# Altium PCB PCB1.PcbDoc (part 2 of 2)
Units mil, origin at the board's own origin, x right, y up, seen from the top; angles counter-clockwise.
Board outline 866.14 x 866.14 mil, 4 copper layers (Top Layer, Int1 (GND), Int2 (PWR), Bottom Layer), stack 53.912 mil thick; 31 components, 65 nets, 217 pads, 195 vias.
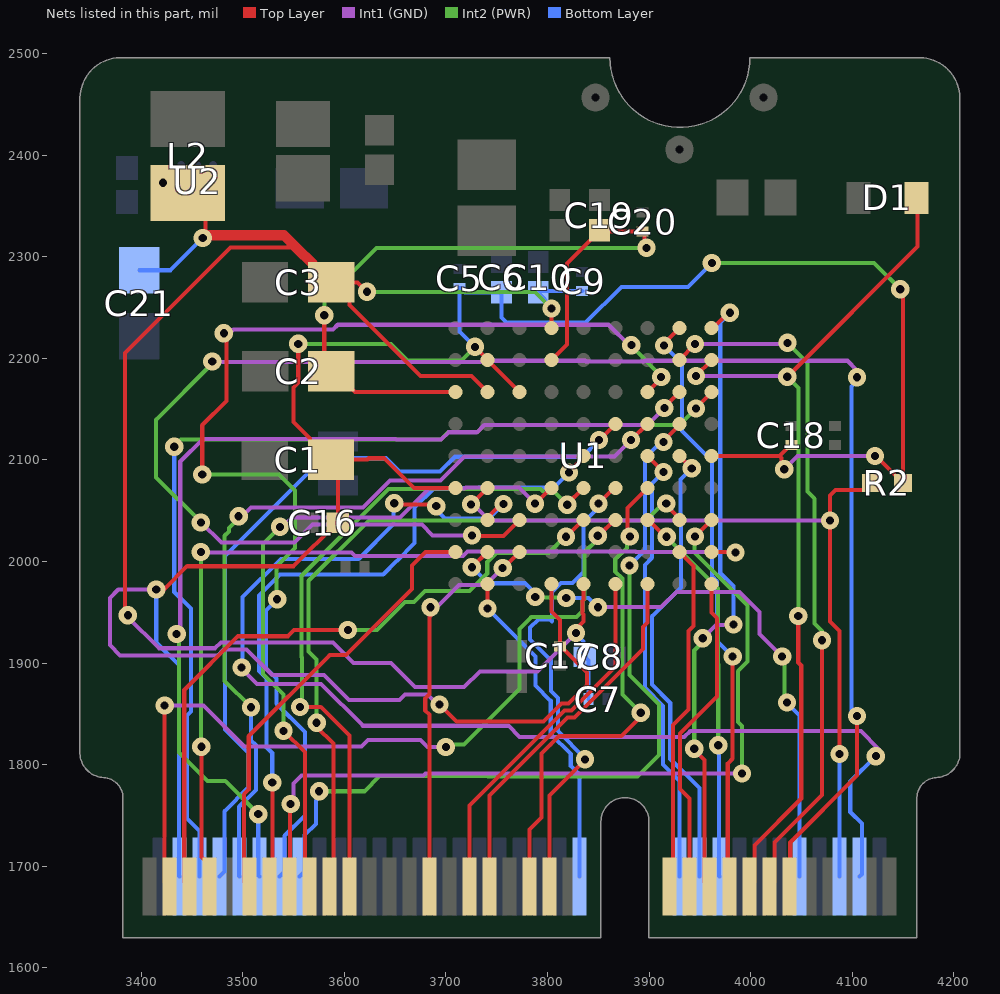
[diagram p4: the nets of this part, all layers, seen from the top]

## Via types
v1: diameter 18, hole 8, Top Layer to Bottom Layer, tented both sides, 195 vias

## Nets (pads, with @x,y where several pads share a name; then routed paths per layer and width w, separated by ;. In a path a pad name is that pad's centre, name@x,y a point inside that pad or via, vN(x,y) a via of type N, cw(c..) or ccw(c..) an arc to the next point about the centre after c; other vN are vias at no path point) (continued)
OWM_IO: pad.62 U1.G7 | length 1143.8
  Top Layer w4: v1(3460.24,2085.83) 3460.24,2134.21 3484.08,2158.05 3484.08,2222.22 v1(3481.5,2224.8) ; U1.G7@3898.43,2166.93 3911.88,2180.38 v1(3911.88,2181.78)
  Int1 (GND) w4: v1(3481.5,2224.8) 3484.17,2227.48 3490.01,2227.48 3490.84,2228.31 3588.8,2228.31 3593.6,2233.11 3860.23,2233.11 3881.14,2212.2 3881.95,2213 v1(3882.55,2213)
  Int2 (PWR) w4: v1(3460.24,2085.83) 3535.83,2085.83 3551.57,2070.08 3551.57,2013.45 3533.19,1995.06 3533.19,1963.79 v1(3533.99,1962.99) ; v1(3882.55,2213) 3882.55,2212.06 3911.88,2182.73 v1(3911.88,2181.78)
  Bottom Layer w4: v1(3533.99,1962.99) 3523.01,1952.01 3523.01,1895.38 3533.46,1884.93 3533.46,1860.09 3561.24,1832.31 3561.24,1750.22 3541.19,1730.17 3541.19,1694.89 pad.62@3536.3,1690
OWM_PE: pad.60 U1.H6 | length 801.6
  Top Layer w4: v1(3914.26,2117.73) 3914.26,2118.75 3929.92,2134.41 U1.H6@3929.92,2135.43
  Int2 (PWR) w4: v1(3575.27,1773.95) 3619.88,1773.95 3634.91,1788.98 3740.94,1788.98 3741.26,1788.66 3888.66,1788.66 3909.67,1809.67 3909.67,1859.23 3880.71,1888.19 v1(3880.71,1996.06)
  Bottom Layer w4: pad.60@3555.98,1690 3560.87,1694.89 3560.87,1730.71 3572.05,1741.89 3572.05,1764.61 3572.59,1765.15 3572.59,1771.27 v1(3575.27,1773.95) ; v1(3880.71,1996.06) 3895.89,2011.24 3895.89,2101.8 3912.6,2118.5 3913.38,2117.73 v1(3914.26,2117.73)
PCIF_D0: pad.55 U1.E4 | length 665.8
  Top Layer w4: v1(3556.49,1856.86) 3556.71,1857.09 3576.89,1857.09 3605.2,1828.77 pad.55@3605.2,1680.16 ; v1(3819.44,2055.92) 3819.44,2056.45 U1.E4@3835.43,2072.44
  Int2 (PWR) w4: v1(3556.49,1856.86) 3558.49,1858.86 3558.49,1905.83 3558.01,1906.31 3558.01,1986.07 3643.41,2071.48 3793.03,2071.48 3796.93,2067.58 3807.78,2067.58 v1(3819.44,2055.92)
PCIF_D1: pad.59 U1.D4 | length 676.2
  Top Layer w4: v1(3540.31,1833.44) 3561.27,1812.49 3561.27,1684.72 pad.59@3565.83,1680.16 ; v1(3787.71,2057) 3788.1,2057 3803.54,2072.44 U1.D4@3803.94,2072.44
  Int1 (GND) w4: v1(3536.78,2034.23) 3539.48,2034.23 3548.74,2043.48 3655.01,2043.48 3683.45,2071.92 3718.61,2071.92 3719.56,2072.87 3772.01,2072.87 3787.71,2057.17 v1(3787.71,2057)
  Int2 (PWR) w4: v1(3536.78,2034.23) 3519.99,2017.4 3519.99,1889.46 3540.31,1869.13 v1(3540.31,1833.44)
PCIF_D2: pad.61 U1.J3 | length 832.1
  Top Layer w4: pad.61@3546.14,1680.16 3546.69,1680.71 3546.69,1760.87 v1(3547.24,1761.42) ; v1(3945.32,2024.8) U1.J3@3961.42,2040.94
  Int1 (GND) w4: v1(3547.24,1761.42) 3550.11,1764.29 3550.11,1781.61 3557.95,1789.45 3677.99,1789.45 3679.79,1791.25 3741.4,1791.25 3741.49,1791.34 v1(3991.49,1791.34)
  Int2 (PWR) w4: v1(3945.32,2024.8) 3944.88,2024.36 3944.88,2009.06 3997.07,1956.87 3997.07,1901.6 3987.57,1892.1 3987.57,1842.23 3991.49,1838.31 v1(3991.49,1791.34)
PCIF_D3: pad.57 U1.H3 | length 717.6
  Top Layer w4: v1(3572.83,1841.34) 3572.83,1837.28 3589.27,1820.85 3589.27,1683.92 pad.57@3585.51,1680.16 ; v1(3916.89,2057.09) 3916.89,2055.53 3929.92,2042.5 U1.H3@3929.92,2040.94
  Int2 (PWR) w4: v1(3572.83,1841.34) 3572.83,1903.54 3565.01,1911.37 3565.01,1981.15 3624.47,2040.61 3772.04,2040.61 3772.22,2040.43 3897.12,2040.43 3913.78,2057.09 v1(3916.89,2057.09)
PCIF_D4: pad.18 U1.G3 | length 381.7
  Top Layer w4: U1.G3@3898.43,2040.94 3899.61,2040.94 3916.14,2024.41 v1(3917.32,2024.41)
  Int2 (PWR) w4: v1(3917.32,2024.41) 3968.07,1973.66 3968.07,1898.55 3968.11,1898.51 v1(3968.11,1819.29)
  Bottom Layer w4: v1(3968.11,1819.29) 3968.74,1818.66 3968.74,1690.63 pad.18@3969.37,1690
PCIF_D5: pad.73 U1.F3 | length 809.1
  Top Layer w4: v1(3423.23,1858.27) 3423.23,1684.96 pad.73@3428.03,1680.16 ; v1(3849.56,2025.43) 3850.49,2025.43 3866,2040.94 U1.F3@3866.93,2040.94
  Int1 (GND) w4: v1(3423.23,1858.27) 3461.42,1858.27 3501.57,1818.11 3616.86,1818.11 3623.2,1824.45 3675.09,1824.45 3682.09,1817.45 v1(3700,1817.45)
  Int2 (PWR) w4: v1(3700,1817.45) 3700,1819.77 3717.8,1819.77 3772.63,1874.6 3772.63,1933.86 3784.09,1945.32 3828.39,1945.32 3834.61,1951.54 3834.61,1961.33 3836.57,1963.3 3836.57,2009.19 3849.56,2022.18 v1(3849.56,2025.43)
PCIF_D6: pad.71 U1.E3 | length 664.5
  Top Layer w4: pad.71@3447.72,1680.16 3442.83,1685.05 3442.83,1708.74 3442.52,1709.05 3442.52,1873.62 3495.45,1926.55 3544.55,1926.55 3550.65,1932.66 v1(3603.54,1932.66) ; v1(3818.28,2024.49) 3818.63,2024.49 3835.08,2040.94 U1.E3@3835.43,2040.94
  Int2 (PWR) w4: v1(3603.54,1932.66) 3632.26,1932.66 3659.84,1960.24 3665.75,1960.24 3668.87,1960.24 3679.53,1970.91 3723.22,1970.91 3740.75,1988.43 3740.75,1999.76 3749.69,2008.7 3801.42,2008.7 3817.21,2024.49 v1(3818.28,2024.49)
PCIF_D7: pad.69 U1.J2 | length 887
  Top Layer w4: v1(3459.35,1817.72) 3459.35,1711.03 3459.61,1710.78 3459.61,1709.05 3461.95,1706.7 3462.51,1706.7 3467.4,1701.82 pad.69@3467.4,1680.16 ; U1.J2@3961.42,2009.45 3961.63,2009.24 3984.87,2009.24 v1(3985.08,2009.03)
  Int1 (GND) w4: v1(3458.89,2009.45) 3459.3,2009.03 3607.08,2009.03 3610.46,2005.65 3716.95,2005.65 3721.37,2010.06 3886.51,2010.06 3887.08,2009.49 3984.62,2009.49 v1(3985.08,2009.03)
  Int2 (PWR) w4: v1(3458.89,2009.45) 3459.12,2009.22 3459.12,1817.95 v1(3459.35,1817.72)
PCIF_D10: pad.32 U1.B1 | length 325.5
  Top Layer w4: v1(3740.94,1953.94) U1.B1@3740.94,1977.95
  Bottom Layer w4: v1(3740.94,1953.94) 3788.28,1906.6 3788.28,1877.97 3803.24,1863.02 3803.24,1830.18 3822.97,1810.45 3822.97,1798.96 3831.58,1790.35 pad.32@3831.58,1690
PCIF_D11: pad.47 U1.C2 | length 392.4
  Top Layer w4: pad.47@3683.94,1680.16 3683.94,1849.41 3679.7,1853.65 3679.7,1865.25 3683.94,1869.49 3683.94,1933.86 3683.94,1945.55 3689.23,1950.85 v1(3684.96,1955.12) ; v1(3755.91,1993.7) 3756.69,1993.7 U1.C2@3772.44,2009.45
  Int1 (GND) w4: v1(3684.96,1955.12) 3691.34,1955.12 3713.16,1976.94 3739.14,1976.94 v1(3755.91,1993.7)
PCIF_HSYNC: pad.65 U1.A2 | length 444.3
  Top Layer w4: pad.65@3506.77,1680.16 3501.88,1685.05 3501.88,1708.52 3501.35,1709.05 3501.35,1771.04 3505.99,1775.68 3505.99,1828.11 3585.76,1907.87 3601.57,1907.87 3666.54,1972.83 3666.54,1996.06 3679.92,2009.45 U1.A2@3709.45,2009.45
PCIF_PCLK: pad.10 U1.B2 | length 614.9
  Top Layer w4: v1(3725.59,1994.49) 3725.79,1994.49 3740.75,2009.45 U1.B2@3740.94,2009.45
  Int1 (GND) w4: v1(3849.61,1955.12) 3911.86,1955.12 3926.82,1970.08 3988.98,1970.08 4008.65,1950.4 4008.65,1928.93 v1(4031.01,1906.57)
  Int2 (PWR) w4: v1(3787.94,1965.31) 3788.51,1964.74 3817.94,1964.74 v1(3818.5,1964.17) ; v1(4031.01,1906.57) 4033.41,1904.17 4033.41,1863.69 v1(4035.81,1861.29)
  Bottom Layer w4: v1(3725.59,1994.49) 3741.38,1978.7 3777.99,1978.7 3788.98,1967.72 3787.94,1966.68 v1(3787.94,1965.31) ; v1(3818.5,1964.17) 3840.55,1964.17 v1(3849.61,1955.12) ; v1(4035.81,1861.29) 4035.81,1860.64 4048.11,1848.35 pad.10@4048.11,1690
PCIF_VSYNC: pad.63 U1.E5 | length 691.1
  Top Layer w4: pad.63@3526.46,1680.16 3529.35,1683.05 3529.35,1782.46 v1(3529.13,1782.68) ; v1(3821.26,2087.8) 3821.26,2088.78 3835.43,2102.95 U1.E5@3835.43,2103.94
  Bottom Layer w4: v1(3529.13,1782.68) 3529.13,1811.42 3523.62,1816.93 3523.62,1884.87 3516.01,1892.48 3516.01,1966.52 3536.81,1987.32 3638.39,1987.32 3651.65,2000.58 3651.7,2000.58 3669.24,2018.12 3669.24,2053.12 3688.66,2072.54 3732.59,2072.54 3732.92,2072.87 3806.34,2072.87 v1(3821.26,2087.8)
PDOWN: pad.11 U1.C3 | length 1721.8
  Top Layer w4: v1@3725.85,2025.85 v1(3725.69,2025.85) 3726.34,2025.2 3756.69,2025.2 U1.C3@3772.44,2040.94 ; pad.11@4038.27,1680.16 4038.98,1680.87 4038.98,1723.62 4104.72,1789.37 v1(4104.72,1848.03)
  Int1 (GND) w4: v1(3458.89,2038.58) 3459.06,2038.58 3479.05,2018.59 3550.87,2018.59 3568.76,2036.48 3676.34,2036.48 3686.97,2025.85 v1(3725.69,2025.85) ; v1(3470.08,2196.85) 3470.58,2196.35 3734.88,2196.35 3736.2,2197.68 3837.22,2197.68 3838.05,2196.85 3894.77,2196.85 3895.59,2197.68 4095.24,2197.68 4104.33,2188.58 4104.33,2181.89 v1(4104.72,2181.5)
  Int2 (PWR) w4: v1(3458.89,2038.58) 3458.89,2038.75 3414.79,2082.85 3414.79,2139.59 3470.08,2194.88 v1(3470.08,2196.85)
  Bottom Layer w4: v1(4104.72,1848.03) 4101.75,1848.03 4099.39,1850.39 4099.39,2172.37 4104.72,2177.71 v1(4104.72,2181.5)
PT0: pad.37 U1.G4 | length 498.9
  Top Layer w4: pad.37@3782.36,1680.16 3782.36,1736.3 3794.28,1748.22 3794.28,1811.14 3802.73,1819.59 3811.31,1828.16 3872.65,1828.16 3891.88,1847.39 v1(3891.88,1851.18) ; v1(3881.1,2024.8) 3878.93,2026.98 3878.93,2052.95 U1.G4@3898.43,2072.44
  Int2 (PWR) w4: v1(3881.1,2024.8) 3878.42,2022.12 3878.42,2013.58 3866.71,2001.86 3866.71,1990.26 3873.71,1983.26 3873.71,1869.35 v1(3891.88,1851.18)
PT1: pad.35 U1.F4 | length 481.8
  Top Layer w4: pad.35@3802.05,1680.16 3802.05,1769.77 3837.01,1804.72 v1(3837.01,1805.34) ; v1(3850.27,2057.04) 3865.68,2072.44 U1.F4@3866.93,2072.44
  Bottom Layer w4: v1(3837.01,1805.34) 3837.01,1806.31 3810.24,1833.08 3810.24,1865.92 3803.59,1872.56 3803.59,1902.59 3782.85,1923.34 3782.85,1934.93 3791.05,1943.13 3802.65,1943.13 3804.5,1941.28 3804.5,1943.13 3804.5,1969.97 3813.45,1978.91 3824.7,1978.91 3835.56,1989.78 3835.56,2038.54 3850.27,2053.25 v1(3850.27,2057.04)
QSPI0_MOSI: pad.64 U1.H7 | length 974.9
  Top Layer w4: v1(3915.03,2151.22) 3915.03,2152.04 U1.H7@3929.92,2166.93
  Int1 (GND) w4: v1(3435.02,1928.74) 3435.02,1932.53 3438.51,1936.01 3438.51,1936.14 3438.58,1936.22 3438.58,2098.43 3461.02,2120.87 3650.39,2120.87 3651.22,2120.04 3695.19,2120.04 3702.44,2127.29 3730.44,2127.29 3737.8,2134.65 3898.45,2134.65 v1(3915.03,2151.22)
  Int2 (PWR) w4: v1(3435.02,1928.74) 3437.23,1926.53 3437.23,1811.98 3465.35,1783.86 3482.9,1783.86 v1(3515.35,1751.4)
  Bottom Layer w4: v1(3515.35,1751.4) 3515.35,1691.26 pad.64@3516.61,1690
QSPI0_SDIO2: pad.66 U1.G6 | length 820.1
  Top Layer w4: v1(3882.24,2119.65) 3882.44,2119.65 3898.23,2135.43 U1.G6@3898.43,2135.43
  Int1 (GND) w4: v1(3496.06,2044.68) 3499.59,2044.68 3508.18,2053.27 3618.34,2053.27 3645,2079.92 3694.93,2079.92 3718.59,2103.58 3866.18,2103.58 v1(3882.24,2119.65)
  Int2 (PWR) w4: v1(3496.06,2044.68) 3496.06,2042.56 3486.52,2033.01 3486.52,2029.67 3482.28,2025.44 3482.28,1882.68 v1(3508.27,1856.69)
  Bottom Layer w4: pad.66@3496.93,1690 3496.46,1690.47 3496.46,1758.7 3512.99,1775.23 3512.99,1819.35 3508.27,1824.07 v1(3508.27,1856.69)
QSPI0_SDIO3: pad.68 U1.F6 | length 786.1
  Top Layer w4: v1(3850.79,2119.58) 3851.07,2119.58 U1.F6@3866.93,2135.43
  Bottom Layer w4: pad.68@3477.24,1690 3482.13,1694.89 3482.13,1754.27 3505.99,1778.13 3505.99,1811.43 3482.68,1834.75 3482.68,2005.51 3578.91,2101.74 3641.17,2101.74 3654.37,2088.54 3694.4,2088.54 3709.05,2103.19 3834.4,2103.19 v1(3850.79,2119.58)
QSPI0_SS0: pad.70 U1.J7 | length 988.2
  Top Layer w4: v1(3946.28,2150.79) 3946.28,2151.29 3961.42,2166.43 U1.J7@3961.42,2166.93
  Int2 (PWR) w4: v1(3432.68,2112.99) 3432.68,2113.39 3439.33,2120.04 3695.19,2120.04 3702.71,2127.56 3731.1,2127.56 3738.19,2134.65 3929.92,2134.65 3946.06,2150.79 v1(3946.28,2150.79)
  Bottom Layer w4: v1(3432.68,2112.99) 3432.68,1970.08 3449.02,1953.74 3449.02,1852.28 3445.35,1848.62 3445.35,1747.17 3457.56,1734.96 pad.70@3457.56,1690
RESET: pad.6 R2.1 U1.B4 | length 808
  Top Layer w4: v1@3724.86,2056.36 U1.B4@3740.94,2072.44 ; v1(4087.4,1810.63) 4087.4,1931.89 4078.07,1941.22 4078.07,1986.86 v1(4078.07,2040.43) 4078.07,2065.08 4083.56,2070.57 4111.55,2070.57 R2.1@4118.41,2077.42
  Int1 (GND) w4: v1(3724.84,2056.36) 3727.01,2056.36 3742.94,2040.43 v1(4078.07,2040.43) v1@4078.74,2039.76
  Bottom Layer w4: v1(4087.4,1810.63) 4087.4,1690.08 pad.6@4087.48,1690
RV_TCK: pad.41 U1.G1 | length 366.2
  Top Layer w4: pad.41@3742.99,1680.16 3742.99,1769.75 3801.94,1828.69 3819.74,1846.5 3826.59,1846.5 3893.9,1913.81 3893.9,1933.86 3893.9,1935.54 3898.43,1940.07 U1.G1@3898.43,1977.95
RV_TMS: pad.43 U1.F1 | length 361.3
  Top Layer w4: pad.43@3723.31,1680.16 3723.31,1759.97 3799.04,1835.69 3816.84,1853.5 3823.69,1853.5 3866.93,1896.74 3866.93,1933.86 U1.F1@3866.93,1977.95
SQWOUT: pad.4 U1.B3 | length 1223
  Top Layer w4: v1(3649.21,2057.48) 3650.65,2056.05 3689.09,2056.05 v1(3690.52,2054.61) ; U1.B3@3740.94,2040.94 3740.94,2043.31 3754.33,2056.69 v1(3756.69,2056.69)
  Int1 (GND) w4: v1(3498.99,1895.67) 3498.99,1894.71 3514,1879.7 3576.99,1879.7 3618.24,1838.45 3761.55,1838.45 3772.67,1827.33 3934.62,1827.33 3940.58,1833.29 4108.44,1833.29 4125.98,1815.75 4123.23,1812.99 v1(4123.23,1808.55)
  Bottom Layer w4: v1(3498.99,1895.67) 3500,1896.68 3500,1964.96 3537.8,2002.76 3614.28,2002.76 3648.33,2036.81 3648.33,2056.6 v1(3649.21,2057.48) ; v1@3690.55,2054.59 3690.55,2050.79 3698.98,2042.36 3742.36,2042.36 v1(3756.69,2056.69) ; pad.4@4107.17,1690 4109.45,1692.28 4109.45,1742.13 4098.03,1753.54 4098.03,1783.35 v1(4123.23,1808.55)
SWDCLK: pad.21 U1.J1 | length 319
  Top Layer w4: pad.21@3939.84,1680.16 3939.84,1766.69 3930.49,1776.04 3930.49,1830.88 3966.9,1867.29 3966.9,1933.86 3966.9,1944.26 3961.42,1949.74 U1.J1@3961.42,1977.95
SWDIO: pad.23 U1.H2 | length 344.8
  Top Layer w4: pad.23@3920.16,1680.16 3923.45,1683.45 3923.45,1839.03 3938.9,1854.48 3938.9,1931.76 3940.99,1933.86 3943.74,1936.61 3943.74,1995.63 U1.H2@3929.92,2009.45
TMR0A_IOA: D1.2 pad.15 U1.J8 | length 869.9
  Top Layer w4: v1(3946.28,2182.68) 3946.28,2182.98 3961.42,2198.12 U1.J8@3961.42,2198.43 ; pad.15@3998.9,1680.16 4003.79,1685.05 4003.79,1720.61 4049.81,1766.63 4049.81,1897.6 4046.85,1900.56 v1(4046.85,1946.46) ; v1(4036.02,2181.9) 4164.17,2310.06 D1.2@4164.17,2357.87
  Int1 (GND) w4: v1(3946.28,2182.68) 4035.25,2182.68 v1(4036.02,2181.9)
  Int2 (PWR) w4: v1(4036.02,2181.9) 4047.07,2170.85 4047.07,1946.68 v1(4046.85,1946.46)
TMR0A_IOB: pad.13 U1.H8 | length 684.2
  Top Layer w4: U1.H8@3929.92,2198.43 3929.92,2198.62 3945.28,2213.98 v1(3945.28,2214.17) ; pad.13@4018.58,1680.16 4023.47,1685.05 4023.47,1723.47 4070.27,1770.27 v1(4070.27,1922.62)
  Int1 (GND) w4: v1(3945.28,2214.17) 4035.2,2214.17 v1(4036.3,2215.27)
  Int2 (PWR) w4: v1(4036.3,2215.27) 4056,2195.56 4056,2068.87 4062.99,2061.88 4062.99,1938.98 4070.27,1931.7 v1(4070.27,1922.62)
TMR1B_IOAN: pad.20 U1.H5 | length 454.9
  Top Layer w4: U1.H5@3929.92,2103.94 v1@3942.05,2091.81
  Bottom Layer w4: v1(3942.06,2091.81) 3930.89,2080.64 3930.89,2046.76 3931.32,2046.33 3931.32,1974.58 3902.93,1946.19 3902.93,1878.85 3920.87,1860.91 3920.87,1805.91 3949.69,1777.08 pad.20@3949.69,1690
TMR1B_IOBN: pad.22 U1.G5 | length 442.3
  Top Layer w4: U1.G5@3898.43,2103.94 v1(3914.3,2088.08)
  Bottom Layer w4: v1(3914.3,2088.08) 3902.89,2076.67 3902.89,2003.79 3895.93,1996.83 3895.93,1875.95 3913.87,1858.01 3913.87,1800.26 3930,1784.13 pad.22@3930,1690
UART0_RX: pad.19 U1.J9 | length 630.2
  Top Layer w4: v1(3944.49,1815.75) 3944.49,1814.84 3954.64,1804.69 3954.64,1685.05 pad.19@3959.53,1680.16 ; U1.J9@3961.42,2229.92 3962.99,2229.92 3977.95,2244.88 v1(3979.53,2244.88)
  Int1 (GND) w4: v1(3952.9,1924.55) 3966.07,1937.72 3982.61,1937.72 v1(3983.07,1938.19)
  Int2 (PWR) w4: v1(3944.49,1815.75) 3944.49,1912.35 3952.9,1920.76 v1(3952.9,1924.55)
  Bottom Layer w4: v1(3979.53,2244.88) 3970.08,2235.43 3970.08,1988.77 3983.07,1975.78 v1(3983.07,1938.19)
UART0_TX: pad.17 U1.H9 | length 586.8
  Top Layer w4: v1(3914.72,2212.74) 3914.72,2214.72 U1.H9@3929.92,2229.92 ; pad.17@3979.21,1680.16 3977.49,1681.88 3977.49,1801.13 3982.31,1805.95 v1(3982.31,1906.64)
  Bottom Layer w4: v1(3914.72,2212.74) 3932.28,2195.17 3932.28,2128.74 3961.93,2099.1 3961.93,1985.61 3966.9,1980.64 3966.9,1933.86 3966.9,1922.05 v1(3982.31,1906.64)
VCOREA: C3.1 C7.1 C8.2 C9.1 C10.2 C21.1 L2.2 U1.B7 U1.D9 U1.E1 U2.A2 | length 1924.1
  Top Layer w4: v1(3387.01,1947.24) 3384.33,1949.92 3384.33,1956.51 3384.25,1956.59 3384.25,2205.41 3487.9,2309.06 3552.91,2309.06 3566.37,2295.6 3566.37,2292.73 3584.29,2274.8 C3.1@3590.04,2274.8 ; L2.2@3446.06,2362.75 3463.39,2345.43 v1@3463.39,2321.26 ; v1(3622.44,2265.55) 3613.18,2274.8 C3.1@3590.04,2274.8 ; U1.B7@3740.94,2166.93 3725.35,2182.52 3674.92,2182.52 3604.96,2252.48 3604.96,2259.88 C3.1@3590.04,2274.8 ; U1.D9@3803.94,2229.92 v1(3803.94,2249.21) ; v1(3828.13,1929.75) 3828.13,1933.54 3835.43,1940.84 3835.43,1948.08 3834.61,1948.9 3834.61,1961.33 3835.43,1962.16 U1.E1@3835.43,1977.95
  Top Layer w10: v1(3460.7,2318.58) 3463.39,2321.26 3540.71,2321.26 3552.91,2309.06 3569.37,2292.6 3569.37,2289.73 3569.72,2289.37 C3.1@3572.6,2289.37
  Int1 (GND) w4: v1(3387.01,1947.24) 3386.61,1946.85 3386.61,1945.67 3417.54,1914.74 3472.77,1914.74 3478.5,1920.47 3588.78,1920.47 3609.08,1900.17 3646,1900.17 3669.8,1876.38 3718,1876.38 3733.57,1891.95 3790.33,1891.95 v1(3828.13,1929.75)
  Int2 (PWR) w4: v1(3622.44,2265.55) 3787.6,2265.55 v1(3803.94,2249.21)
  Bottom Layer w4: C21.1@3398.43,2286.77 3428.9,2286.77 v1(3460.7,2318.58) ; v1(3421.65,2372.83) 3422.61,2373.79 3438.75,2373.79 U2.A2@3439.49,2374.53 ; v1(3803.94,2249.21) 3803.94,2251.18 3790.94,2264.17 C10.2@3790.94,2264.96 3792.32,2266.34 C9.1@3834.25,2266.34 ; v1(3828.13,1929.75) 3828.13,1928.81 3835.43,1921.5 3835.43,1907.48 3840.26,1902.66 C7.1@3840.26,1864.57
VREGO_A: C1.1 C5.1 C6.2 C16.2 C17.1 C18.1 pad.72 R2.2 U1.A4 U1.B8 U1.C7 U1.D1 U1.J5 | length 2800.9
  Top Layer w4: v1(3415.01,1972.44) 3415.8,1973.23 3423.23,1973.23 3445.45,1995.45 3550.17,1995.45 3592.91,2038.19 C16.2@3593.7,2038.19 3593.7,2093.58 C1.1@3586.89,2100.39 ; v1(3554.72,2214.31) 3554.72,2176.3 3549.96,2171.54 3549.96,2137.32 3566.09,2121.19 3566.09,2118.32 3584.02,2100.39 C1.1@3586.89,2100.39 ; v1(3693.7,1859.45) 3693.7,1859.3 3710.3,1842.69 3796.14,1842.69 3813.94,1860.5 3820.79,1860.5 3838.93,1878.64 3838.93,1890.7 3813.19,1916.44 C17.1@3812.2,1916.44 3812.2,1942.5 3803.94,1950.76 U1.D1@3803.94,1977.95 ; U1.A4@3709.45,2072.44 3668.5,2072.44 3639.2,2101.74 3624.12,2101.74 3622.77,2100.39 C1.1@3586.89,2100.39 ; v1(3728.66,2211.35) 3740.94,2199.07 U1.B8@3740.94,2198.43 U1.C7@3772.44,2166.93 ; U1.J5@3961.42,2103.94 4028.31,2103.94 ; v1(4033.07,2090.94) 4030.39,2093.62 4030.39,2101.85 4028.31,2103.94 ; C18.1@4041.14,2114.96 C18.1@4040.16,2114.96 4039.17,2114.96 4028.31,2104.09 4028.31,2103.94 ; v1(4122.44,2103.94) 4123.39,2103.94 R2.2@4149.91,2077.42 4149.91,2265.45 v1(4147.24,2268.11)
  Int1 (GND) w4: v1(3415.01,1972.44) 3377.56,1972.44 3369.29,1964.17 3369.29,1917.72 3379.27,1907.74 3475.67,1907.74 3481.4,1913.47 3503.85,1913.47 3529.13,1888.19 3580.24,1888.19 3604.76,1863.67 3654.5,1863.67 3659.9,1869.07 3682.11,1869.07 3691.73,1859.45 v1(3693.7,1859.45) ; v1(4033.07,2090.94) 4046.06,2103.94 v1(4122.44,2103.94)
  Int2 (PWR) w4: v1(3554.72,2214.31) 3645.93,2214.31 3662.2,2198.03 3715.35,2198.03 v1(3728.66,2211.35) ; v1(3961.81,2293.92) 4121.43,2293.92 v1(4147.24,2268.11)
  Bottom Layer w4: v1(3415.01,1972.44) v1(3415.01,1972.44) 3414.96,1920.47 3437.23,1898.2 3437.23,1690.64 pad.72@3437.87,1690 ; v1(3728.66,2211.35) 3713.39,2226.63 C5.1@3713.39,2269.39 3714.37,2269.39 3718.8,2264.96 C6.2@3754.72,2264.96 3754.72,2240.16 3759.67,2235.21 3837.57,2235.21 3872.83,2270.47 3938.36,2270.47 v1(3961.81,2293.92)
VREGO_B: C2.1 C19.2 C20.1 U1.A7 U1.D8 | length 747.9
  Top Layer w4: v1(3580.32,2242.52) 3580.32,2197.24 3610.63,2166.93 U1.A7@3709.45,2166.93 ; U1.D8@3803.94,2198.43 3819.29,2213.78 3819.29,2293.31 3851.18,2325.2 C19.2@3851.18,2325.98 3852.18,2324.98 3893.62,2324.98 C20.1@3893.7,2324.9 3895.61,2323 3895.61,2310.69 v1(3897.51,2308.79)
  Int2 (PWR) w4: v1(3580.32,2242.52) 3580.75,2242.95 3580.75,2257.52 3631.89,2308.66 3897.38,2308.66 v1(3897.51,2308.79)

## Polygon pours and split planes (outlines as drawn)
GND on Int1 (GND) "GND_PLANE" (solid, pour order 0): 3382.23,1629.99 3852.71,1629.99 3852.71,1744.16 cw(c3876.33,1744.16) 3899.95,1744.16 3899.95,1629.99 4163.73,1629.99 4163.73,1767.79 cw(c4183.82,1767.42) 4182.43,1787.47 ccw(c4181.74,1811.77) 4206.05,1811.09 4206.05,2456.76 ccw(c4165.69,2455.78) 4166.68,2496.13 3999.36,2496.13 cw(c3930.46,2496.13) 3861.56,2496.13 3379.28,2496.13 ccw(c3380.26,2455.78) 3339.91,2456.76 3339.91,1811.09 ccw(c3364.21,1811.77) 3363.53,1787.47 cw(c3361.91,1767.21) 3382.23,1767.79
3V3 on Int2 (PWR) "3V3_PLANE" (solid, pour order 1): 3382.23,1629.99 3852.71,1629.99 3852.71,1744.16 cw(c3876.33,1744.16) 3899.95,1744.16 3899.95,1629.99 4163.73,1629.99 4163.73,1767.79 cw(c4183.82,1767.42) 4182.43,1787.47 ccw(c4181.74,1811.77) 4206.05,1811.09 4206.05,2456.76 ccw(c4165.69,2455.78) 4166.68,2496.13 3999.36,2496.13 cw(c3930.46,2496.13) 3861.56,2496.13 3379.28,2496.13 ccw(c3380.26,2455.78) 3339.91,2456.76 3339.91,1811.09 ccw(c3364.21,1811.77) 3363.53,1787.47 cw(c3361.91,1767.21) 3382.23,1767.79

## Keep-outs
Top Layer:
  region: 4166.22,1787.44 4166.22,1714.96 3378.82,1714.96 3378.82,1787.44
Bottom Layer:
  region: 4166.22,1787.44 4166.22,1734.96 3378.82,1734.96 3378.82,1787.44
  region: 4205.59,1834.68 4205.59,1787.44 3339.45,1787.44 3339.45,1834.68

## Other copper
Top Layer:
  region net GND: 3820.76,2496.13 3852.21,2496.13 3853.97,2479.14 3857.51,2465.29 3863.69,2452.39 3872.26,2440.95 3882.9,2431.4 3895.2,2424.11 3908.69,2419.35 3922.84,2417.32 3930,2417.36 3937.16,2417.32 3951.31,2419.35 3964.8,2424.11 3977.1,2431.4 3987.74,2440.95 3996.31,2452.39 4002.49,2465.29 4006.03,2479.14 4007.79,2496.13 4039.31,2496.13 4037.21,2476.28 4031.53,2457.04 4022.46,2439.14 4010.3,2423.18 3995.45,2409.68 3978.41,2399.1 3959.73,2391.76 3940.03,2387.93 3930,2387.83 3919.95,2387.85 3900.19,2391.58 3881.44,2398.85 3864.35,2409.43 3849.47,2422.95 3837.32,2438.97 3828.29,2456.94 3822.71,2476.25
Bottom Layer:
  region net GND: 4038.27,2486.26 4006.77,2486.26 4006.03,2479.14 4002.49,2465.29 3996.31,2452.39 3987.74,2440.95 3977.1,2431.4 3964.8,2424.11 3951.31,2419.35 3937.16,2417.32 3930,2417.36 3922.84,2417.32 3908.69,2419.35 3895.2,2424.11 3882.9,2431.4 3872.26,2440.95 3863.69,2452.39 3857.51,2465.29 3853.97,2479.14 3853.23,2486.26 3821.73,2486.26 3822.79,2476.28 3828.47,2457.04 3837.54,2439.14 3849.7,2423.18 3864.55,2409.68 3881.59,2399.1 3900.27,2391.76 3919.97,2387.93 3930,2387.83 3940.05,2387.85 3959.81,2391.58 3978.56,2398.85 3995.65,2409.43 4010.53,2422.95 4022.68,2438.97 4031.71,2456.94 4037.29,2476.25 4038.27,2486.26

## Silkscreen, mask and mechanical layers (free items; w line width, h text height)
Top Overlay:
  text "STAT" at 4046.46,2437.64 h60
Top Solder:
  region: 3821.73,2496.1 3861.1,2496.1 3861.43,2489.35 3864.07,2476.1 3869.24,2463.62 3876.74,2452.39 3886.29,2442.84 3897.52,2435.34 3910,2430.17 3923.25,2427.53 3930,2427.2 3936.75,2427.53 3950,2430.17 3962.48,2435.34 3973.71,2442.84 3983.26,2452.39 3990.76,2463.62 3995.93,2476.1 3998.57,2489.35 3998.9,2496.1 4038.27,2496.1 4038.27,2489 4036.42,2474.93 4032.74,2461.22 4027.31,2448.11 4020.22,2435.82 4011.58,2424.56 4001.54,2414.52 3990.28,2405.88 3977.99,2398.79 3964.88,2393.36 3951.17,2389.68 3937.1,2387.83 3930,2387.83 3922.9,2387.83 3908.83,2389.68 3895.12,2393.36 3882.01,2398.79 3869.72,2405.88 3858.46,2414.52 3848.42,2424.56 3839.78,2435.82 3832.69,2448.11 3827.26,2461.22 3823.58,2474.93 3821.73,2489 3821.73,2496.1
Bottom Solder:
  region: 4038.27,2496.1 3998.9,2496.1 3998.57,2489.35 3995.93,2476.1 3990.76,2463.62 3983.26,2452.39 3973.71,2442.84 3962.48,2435.34 3950,2430.17 3936.75,2427.53 3930,2427.2 3923.25,2427.53 3910,2430.17 3897.52,2435.34 3886.29,2442.84 3876.74,2452.39 3869.24,2463.62 3864.07,2476.1 3861.43,2489.35 3861.1,2496.1 3821.73,2496.1 3821.73,2489 3823.58,2474.93 3827.26,2461.22 3832.69,2448.11 3839.78,2435.82 3848.42,2424.56 3858.46,2414.52 3869.72,2405.88 3882.01,2398.79 3895.12,2393.36 3908.83,2389.68 3922.9,2387.83 3930,2387.83 3937.1,2387.83 3951.17,2389.68 3964.88,2393.36 3977.99,2398.79 3990.28,2405.88 4001.54,2414.52 4011.58,2424.56 4020.22,2435.82 4027.31,2448.11 4032.74,2461.22 4036.42,2474.93 4038.27,2489 4038.27,2496.1
Bottom 3D Body:
  lines w0.79: 3367.01,1651.61 4193.78,1651.61
Bottom Assembly:
  region: 3928.46,1774.65 3928.46,1776.22 3953.66,1776.22 3953.66,1774.65
  region: 3925.32,1773.07 3925.32,1774.65 3956.81,1774.65 3956.81,1773.07
  region: 3923.74,1771.5 3923.74,1773.07 3956.81,1773.07 3956.81,1771.5
  region: 3923.74,1769.92 3923.74,1771.5 3956.81,1771.5 3956.81,1769.92
  region: 3923.74,1768.35 3923.74,1769.92 3956.81,1769.92 3956.81,1768.35
  region: 3923.74,1766.77 3923.74,1768.35 3956.81,1768.35 3956.81,1766.77
  region: 3923.74,1765.2 3923.74,1766.77 3955.24,1766.77 3955.24,1765.2
  region: 3923.74,1763.62 3923.74,1765.2 3934.76,1765.2 3934.76,1763.62
  region: 3923.74,1762.05 3923.74,1763.62 3934.76,1763.62 3934.76,1762.05
  region: 3923.74,1760.47 3923.74,1762.05 3934.76,1762.05 3934.76,1760.47
  region: 3923.74,1758.9 3923.74,1760.47 3947.36,1760.47 3947.36,1758.9
  region: 3923.74,1757.32 3923.74,1758.9 3950.51,1758.9 3950.51,1757.32
  region: 3923.74,1755.75 3923.74,1757.32 3950.51,1757.32 3950.51,1755.75
  region: 3923.74,1754.17 3923.74,1755.75 3950.51,1755.75 3950.51,1754.17
  region: 3923.74,1752.6 3923.74,1754.17 3950.51,1754.17 3950.51,1752.6
  region: 3923.74,1751.02 3923.74,1752.6 3950.51,1752.6 3950.51,1751.02
  region: 3923.74,1749.45 3923.74,1751.02 3948.94,1751.02 3948.94,1749.45
  region: 3923.74,1747.87 3923.74,1749.45 3934.76,1749.45 3934.76,1747.87
  region: 3923.74,1746.3 3923.74,1747.87 3934.76,1747.87 3934.76,1746.3
  region: 3923.74,1744.72 3923.74,1746.3 3934.76,1746.3 3934.76,1744.72
  region: 3923.74,1743.15 3923.74,1744.72 3953.66,1744.72 3953.66,1743.15
  region: 3923.74,1741.57 3923.74,1743.15 3956.81,1743.15 3956.81,1741.57
  region: 3923.74,1740 3923.74,1741.57 3956.81,1741.57 3956.81,1740
  region: 3923.74,1738.42 3923.74,1740 3956.81,1740 3956.81,1738.42
  region: 3923.74,1736.85 3923.74,1738.42 3956.81,1738.42 3956.81,1736.85
  region: 3923.74,1735.28 3923.74,1736.85 3956.81,1736.85 3956.81,1735.28
  region: 3925.32,1733.7 3925.32,1735.28 3955.24,1735.28 3955.24,1733.7
Dimensions:
  lines w1.97: 3339.91,1811.09 ccw(c3364.21,1811.77) 3363.53,1787.47 cw(c3364.21,1811.77) 3339.91,1811.09 ; 3339.91,1811.09 3339.91,2456.76 cw(c3380.26,2455.78) 3379.28,2496.13 3861.56,2496.13 ccw(c3930.46,2496.13) 3999.36,2496.13 4166.68,2496.13 cw(c4165.69,2455.78) 4206.05,2456.76 4206.05,1811.09 ; 4206.05,1811.09 cw(c4181.74,1811.77) 4182.43,1787.47 ccw(c4181.74,1811.77) 4206.05,1811.09
  lines w2: 3363.53,1787.47 cw(c3361.91,1767.21) 3382.23,1767.79 3382.23,1629.99 3852.71,1629.99 3852.71,1744.16 cw(c3876.33,1744.16) 3899.95,1744.16 3899.95,1629.99 4163.73,1629.99 4163.73,1767.79 cw(c4183.82,1767.42) 4182.43,1787.47
Mechanical 13:
  lines w4: 3354.41,1598.46 3378.03,1622.09 ; 3362.28,1622.09 3378.03,1622.09 ; 3378.03,1606.34 3378.03,1622.09 ; 4165.43,1606.34 4165.43,1622.09 ; 4181.18,1622.09 4165.43,1622.09 ; 4189.06,1598.46 4165.43,1622.09
  text "Route" at 3930,2477.4 h18.31
  text "Out" at 3930,2459.68 h18.31
  text "Chamfered Edge" at 3592.52,1563.78 h46.5
  text "0.8mm PCB" at 3646.85,1496.06 h46.5
Mechanical 18:
  lines w1.97: 3339.45,1811.06 ccw(c3363.75,1811.74) 3363.07,1787.44 ; 3339.45,2456.73 cw(c3379.8,2455.75) 3378.82,2496.1 ; 4166.22,2496.1 cw(c4165.24,2455.75) 4205.59,2456.73 4205.59,1811.06 cw(c4181.29,1811.74) 4181.97,1787.44
  lines w2: 3339.45,1811.06 3339.45,2456.73 ; 3363.07,1787.44 cw(c3361.46,1767.18) 3381.77,1767.76 3381.77,1629.96 3852.24,1629.96 3852.24,1744.13 cw(c3875.86,1744.13) 3899.49,1744.13 3899.49,1629.96 4163.27,1629.96 4163.27,1767.76 cw(c4183.37,1767.39) 4181.97,1787.44 ; 3378.82,2496.1 3861.1,2496.1 ; 3821.73,2496.1 ccw(c3930,2496.1) 4038.27,2496.1 ; 4166.22,2496.1 3998.9,2496.1 ; 3861.1,2496.1 ccw(c3930,2496.1) 3998.9,2496.1 ; 3861.1,2496.1 ccw(c3930,2496.1) 3998.9,2496.1
  text "2222" at 3772.52,2456.73 h18.31 r180

## Dimensions
3339.91,2456.76 to 4206.05,2456.76 on Mechanical 13
3379.28,2496.13 to 3382.23,1629.99 on Mechanical 13